# Altium PCB PCB1.PcbDoc
Units mil, origin at the board's own origin, x right, y up, seen from the top; angles counter-clockwise.
Board outline 2452.51 x 1847.55 mil, 2 copper layers (Top Layer, Bottom Layer); 55 components, 46 nets, 215 pads, 70 vias.
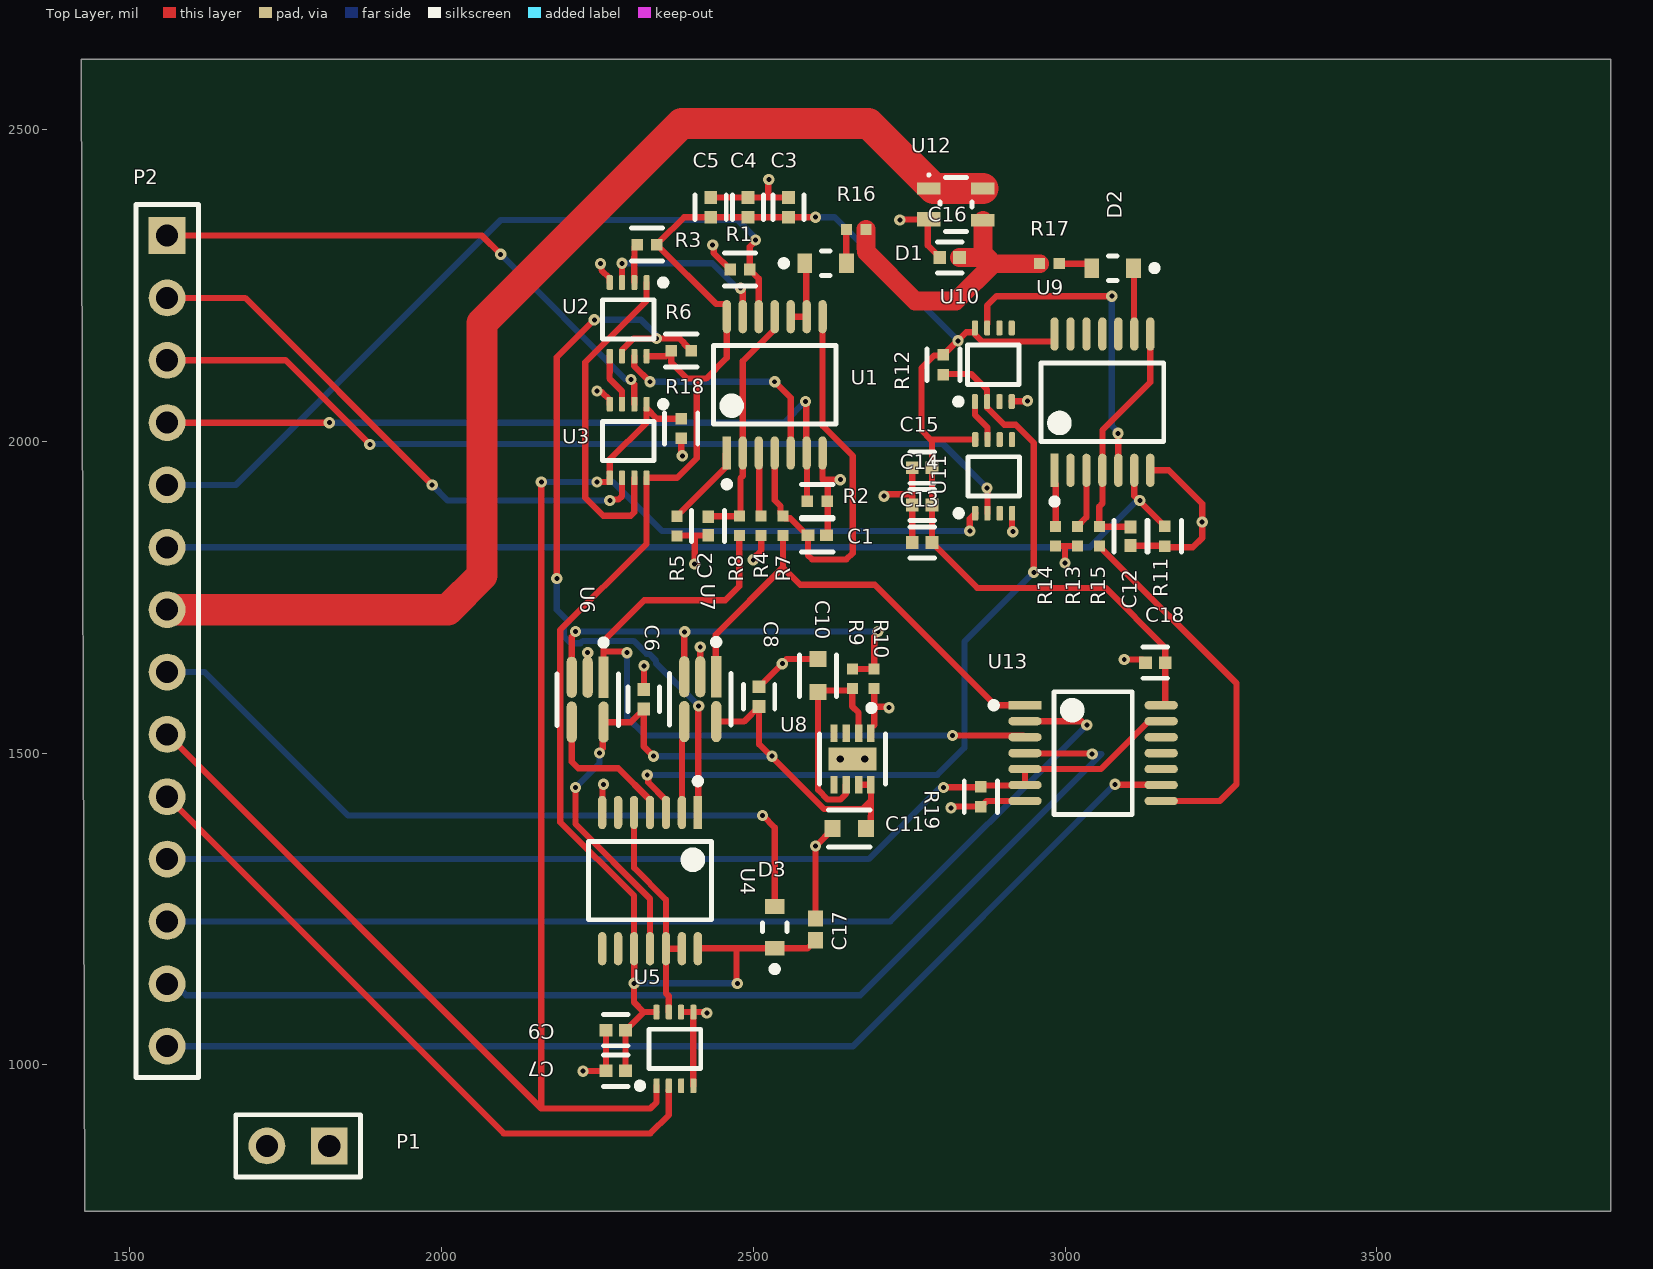
[diagram p0: Top Layer view]
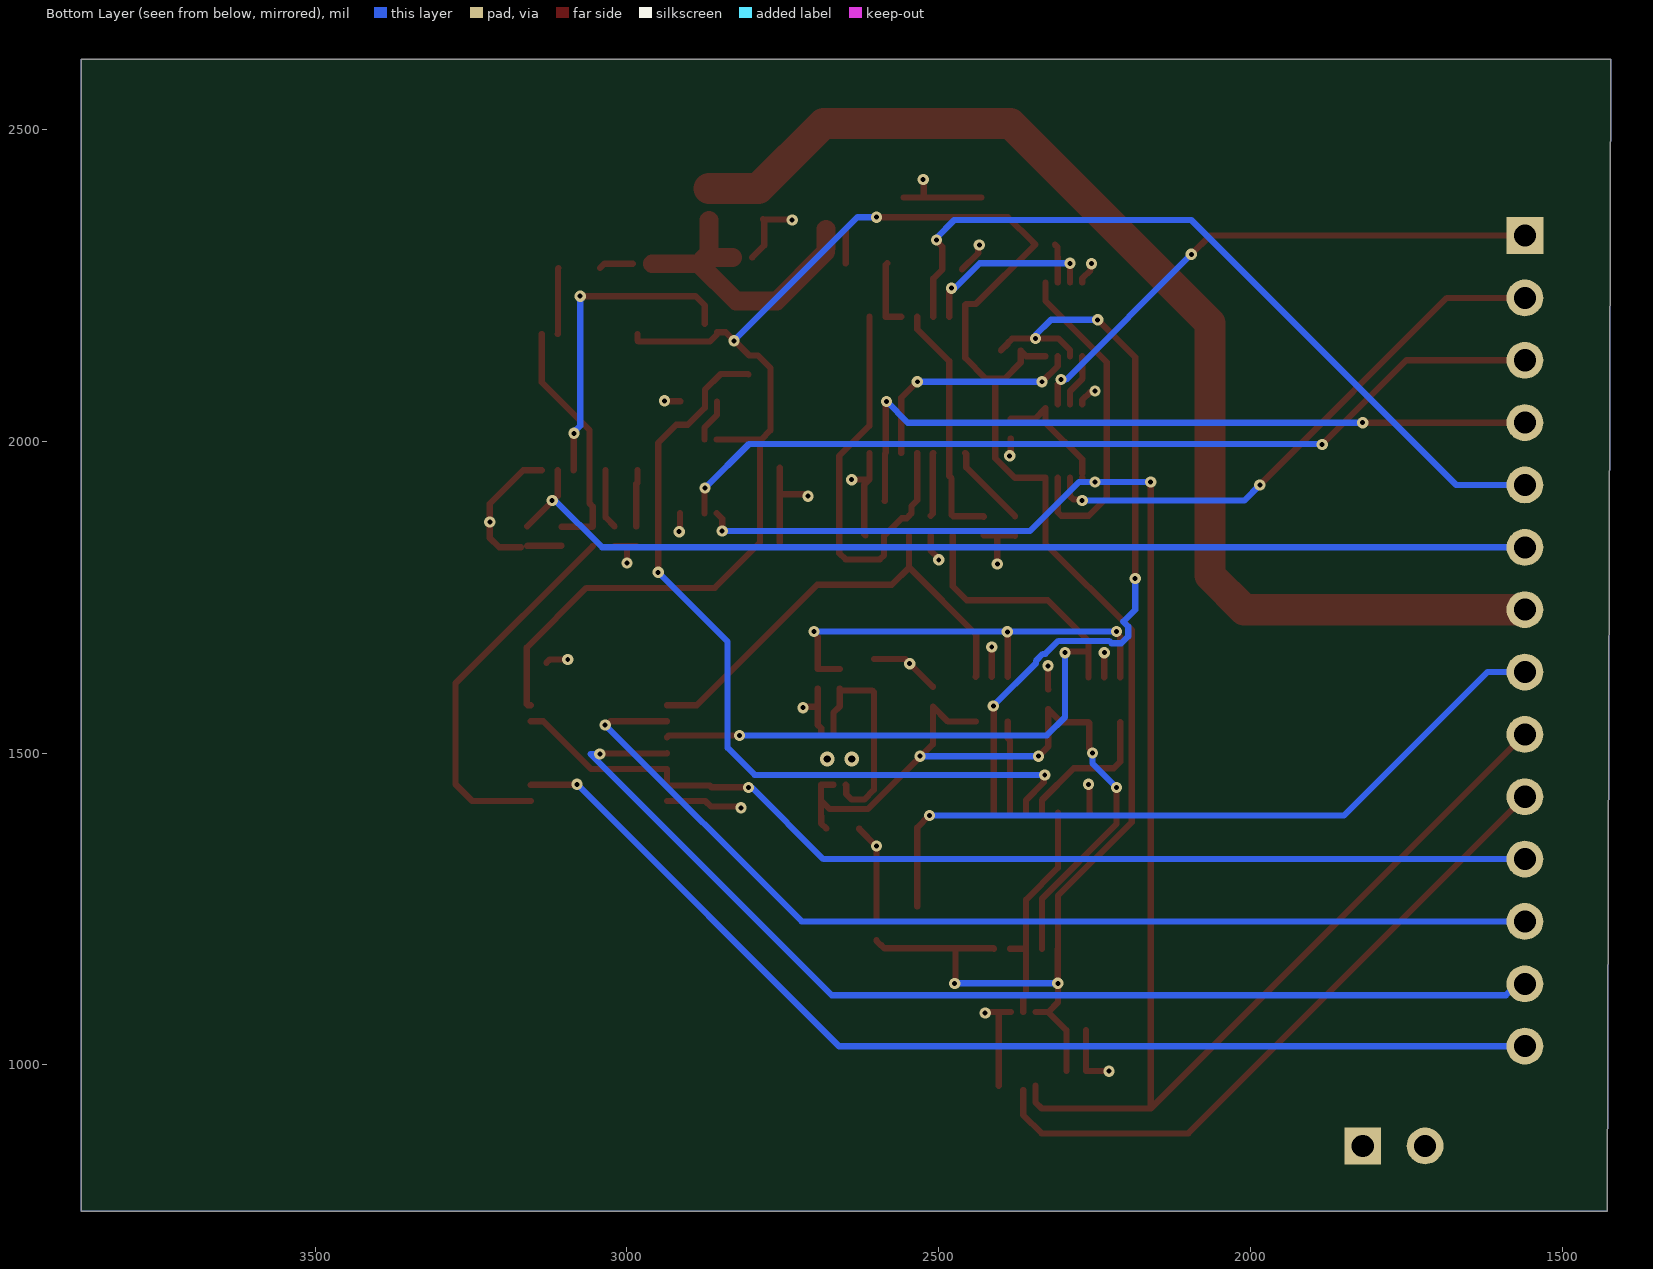
[diagram p1: Bottom Layer view, seen from below]
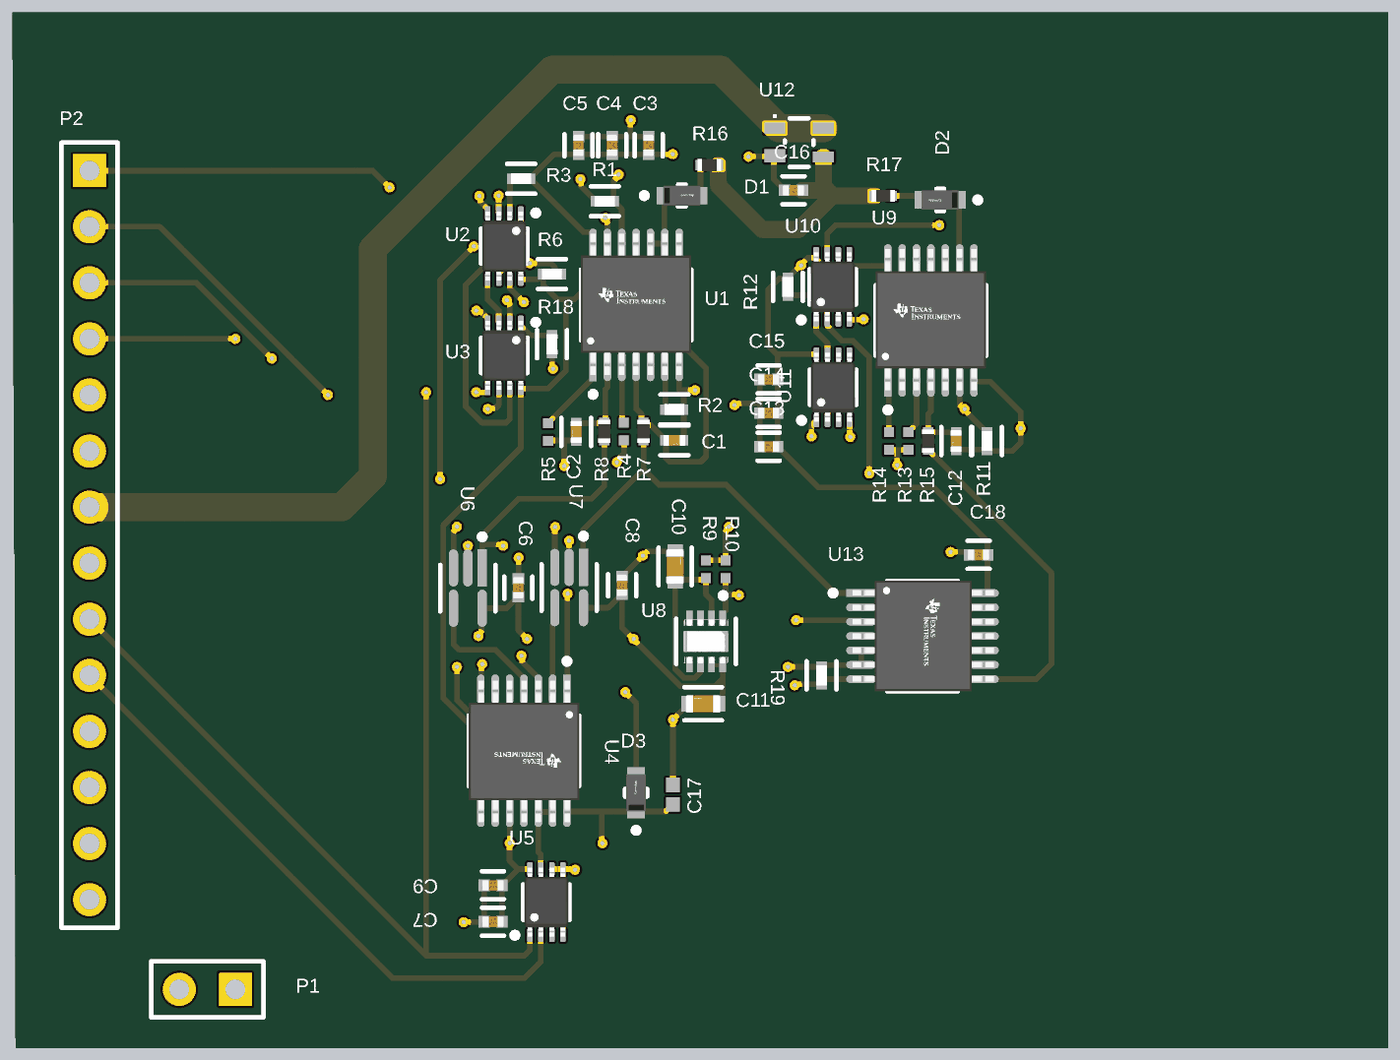
[diagram p2: 3D render of the assembled board from above, using the file's embedded part models]

## Layer stack, top to bottom
Top Solder: solder mask 0.4, Solder Resist, Dk 3.5
Top Layer: signal copper 1.4
Dielectric 1: dielectric 12.6, FR-4, Dk 4.8
Bottom Layer: signal copper 1.4
Bottom Solder: solder mask 0.4, Solder Resist, Dk 3.5

## Board outline
1422.49,2612.55 1428.07,765 3875,765 3875,2612.55

## Design rules (kind name [scope] priority, off if disabled: settings)
Clearance [All] p1: gap=5 ignorepadtopadclearanceinfootprint=FALSE
PolygonConnect [All] p1: connectstyle=Relief reliefconductorwidth=10 reliefentries=4 polygonreliefangle="90 Angle" airgapwidth=10
RoutingVias [All] p1: holewidth=8 width=18 viastyle="Through Hole" minholewidth=8 minwidth=18 maxholewidth=28 maxwidth=50
SolderMaskExpansion [All] p1: expansion=4 istentingtop=FALSE
Width [All] p1: maxlimit=50 minlimit=10 preferedwidth=10
30 further rules are at their usual default settings.

## Classes and differential pairs
component class U_HRT1: C12 C13 C14 C15 D2 R11 R12 R13 R14 R15 U9 U10 U11
component class HRT: C1 C2 C3 C4 C5 D1 R1 R2 R3 R4 R5 R6 R7 R8 U1 U2 U3
component class CHRT: C16 C17 C18 D3 P1 P2 R16 R17 R18 R19 U12 U13
component class Cascade: C6 C7 C8 C9 C10 C11 R9 R10 U4 U5 U6 U7 U8

## Components (designator, comment, footprint, x,y, rotation, side; value= is the part's Value field where it differs from the comment)
C1 "GRM155R71C224KA12D" FP-GRM155-0_05-IPC_C 2602.64,1849.12 r0 top
C2 "GRM155R71C224KA12D" FP-GRM155-0_05-IPC_C 2427.64,1864.12 r270 top
C3 "C0402C104K8PACTU" FP-C0402-BB-MFG 2556.69,2375.19 r90 top value="0.10 μF"
C4 "C0402C104K8PACTU" FP-C0402-BB-MFG 2491.69,2375.19 r90 top value="0.10 μF"
C5 "C0402C104K8PACTU" FP-C0402-BB-MFG 2431.69,2375.19 r90 top value="0.10 μF"
C6 "C0402C104K8PACTU" FP-C0402-BB-MFG 2324.41,1586.34 r270 top value="0.10 μF"
C7 "C0402C104K8PACTU" FP-C0402-BB-MFG 2279.41,990.59 r180 top value="0.10 μF"
C8 "C0402C104K8PACTU" FP-C0402-BB-MFG 2509.41,1590.59 r270 top value="0.10 μF"
C9 "C0402C104K8PACTU" FP-C0402-BB-MFG 2279.41,1055.59 r180 top value="0.10 μF"
C10 "GRM188R71A225KE15D" FP-GRM188-0_1-e0_2_0_5-MFG 2603.94,1624.25 r90 top
C11 "GRM188R71A225KE15D" FP-GRM188-0_1-e0_2_0_5-MFG 2653.94,1379.25 r180 top
C12 "GRM155R71C224KA12D" FP-GRM155-0_05-IPC_C 3105,1847.84 r270 top
C13 "C0402C104K8PACTU" FP-C0402-BB-MFG 2770.75,1837.84 r180 top value="0.10 μF"
C14 "C0402C104K8PACTU" FP-C0402-BB-MFG 2770.75,1897.84 r180 top value="0.10 μF"
C15 "C0402C104K8PACTU" FP-C0402-BB-MFG 2770.75,1957.84 r180 top value="0.10 μF"
C16 "C0402C104K8PACTU" FP-C0402-BB-MFG 2815,2295 r180 top value="0.10 μF"
C17 "ZRB15XR61A106ME01D" CAPC1005X55X25NL05T10 2600,1217.32 r270 top
C18 "C0402C104K8PACTU" FP-C0402-BB-MFG 3145,1645 r0 top value="0.10 μF"
D1 "CDBU0240" FP-SOD-523F-MFG 2615.94,2285.59 r0 top
D2 "CDBU0240" FP-SOD-523F-MFG 3076.54,2277.84 r180 top
D3 "CDBU0240" FP-SOD-523F-MFG 2534.41,1220.59 r90 top
P1 "Header 2" HDR1X2 1820,870 r180 top
P2 "Header 14" HDR1X14 1560,2330 r270 top
R1 "CRCW040210M0JNED" FP-CRCW0402-e3-IPC_C 2478.58,2275.59 r0 top
R2 "CRCW040210M0JNED" FP-CRCW0402-e3-IPC_C 2602.64,1904.12 r180 top
R3 "CRCW040210M0JNED" FP-CRCW0402-e3-IPC_C 2329.41,2315.59 r180 top
R4 "CRCW040222R0FKED" RESC1005X40X25LL05T05 2512.64,1864.87 r270 top
R5 "CRCW040222R0FKED" RESC1005X40X25LL05T05 2377.64,1864.12 r270 top
R6 "CRCW040210M0JNED" FP-CRCW0402-e3-IPC_C 2384.41,2145.59 r0 top
R7 "ERJ-2RKF1000X" RESC1005X40X25LL05T05 2547.64,1864.87 r270 top
R8 "ERJ-2RKF1000X" RESC1005X40X25LL05T05 2477.64,1864.87 r270 top
R9 "ERJ-2GEJ915X" RESC1005X40X25LL05T05 2658.94,1619.25 r270 top
R10 "CRCW04022M40FKED" RESC1005X40X25LL05T05 2693.94,1619.25 r270 top
R11 "CRCW040210M0JNED" FP-CRCW0402-e3-IPC_C 3160,1847.84 r90 top
R12 "CRCW040210M0JNED" FP-CRCW0402-e3-IPC_C 2805,2122.84 r270 top
R13 "CRCW040222R0FKED" RESC1005X40X25LL05T05 3020,1847.84 r270 top
R14 "CRCW040222R0FKED" RESC1005X40X25LL05T05 2985,1847.84 r270 top
R15 "ERJ-2RKF1000X" RESC1005X40X25LL05T05 3055,1847.84 r270 top
R16 "RMCF0402FT10K0" RESC1005X40X25LL05T05 2665,2340 r180 top
R17 "ERJ-2RKF1000X" RESC1005X40X25LL05T05 2975,2285 r0 top
R18 "CRCW040210M0JNED" FP-CRCW0402-e3-IPC_C 2384.41,2020.59 r90 top
R19 "CRCW040210M0JNED" FP-CRCW0402-e3-IPC_C 2865,1430 r270 top
U1 "TS3A4751PWR" FP-PW0014A-IPC_C 2534.41,2090.59 r90 top
U2 "SN74AUP2G00DCUR" DCU0008A_L 2299.41,2195.59 r270 top
U3 "SN74AUP2G79DCUR" DCU0008A_L 2299.41,2000.59 r270 top
U4 "TS3A4751PWR" FP-PW0014A-IPC_C 2334.41,1295.59 r270 top
U5 "SN74AUP2G79DCUR" DCU0008A_L 2374.41,1025.59 r90 top
U6 "TLV3691IDCKR" FP-DCK0005A-IPC_A 2234.41,1585.59 r270 top
U7 "TLV3691IDCKR" FP-DCK0005A-IPC_A 2415,1586.56 r270 top
U8 "MCP1810T-12I/J8A" FP-C04-1207A-MFG 2659.09,1490.59 r270 top
U9 "TS3A4751PWR" FP-PW0014A-IPC_C 3060,2062.84 r90 top
U10 "SN74AUP2G00DCUR" DCU0008A_L 2885,2122.84 r90 top
U11 "SN74AUP2G79DCUR" DCU0008A_L 2885.47,1943.78 r90 top
U12 "S-1313A22-N4T1U3" SC82AB 2825,2380 r0 top
U13 "TS3A4751PWR" FP-PW0014A-IPC_C 3045,1500 r0 top

## Footprints (in the part's own frame and the unit in brackets; to place one, negate y for a bottom-side part, rotate by r counter-clockwise, add the part's x,y. Pads: shape width x height; smd on the part's side, far side on the other; paste and mask are expansions set on the pad)
CAPC1005X55X25NL05T10 [mm] "Chip Capacitor, 2-Leads, Body 1.00x0.50mm, IPC Medium Density"
  rect 0.66x0.62 smd: 1(-0.44,0) 2(0.44,0)
  body extent -0.53,-0.28 0.53,0.27, height 0.55
DCU0008A_L [mm] "SOP, 8-Leads, Body 2.4x2.1mm, Pitch 0.5mm, IPC High Density"
  rrect40% 0.6x0.25 smd: 1(-1.5,0.75) 2(-1.5,0.25) 3(-1.5,-0.25) 4(-1.5,-0.75) 5(1.5,-0.75) 6(1.5,-0.25) 7(1.5,0.25) 8(1.5,0.75)
  silkscreen extent -1.62,-1.05 0.8,1.55, body extent -1.56,-1 1.56,1, height 0.9
FP-C04-1207A-MFG [mm]
  rect 0.7x0.3 smd paste+0 mask+0: 1(-1.05,0.75) 2(-1.05,0.25) 3(-1.05,-0.25) 4(-1.05,-0.75) 5(1.05,-0.75) 6(1.05,-0.25) 7(1.05,0.25) 8(1.05,0.75)
  rect 0.95x1.95 smd paste+0 mask+0: 9(0,0)
  silkscreen extent -2.2,-1.35 1.02,1.35, body extent -1.5,-1.12 1.5,1.12, height 0.25
FP-C0402-BB-MFG [mm]
  rect 0.52x0.52 smd paste+0 mask+0: 1(-0.4,0) 2(0.4,0)
  silkscreen extent -0.5,-0.64 0.5,0.64, body extent -0.8,-0.4 0.8,0.4, height 0.25
FP-CRCW0402-e3-IPC_C [mil]
  rect 18.43x18.6 smd paste+0 mask+0: 1(-15.83,0) 2(15.83,0)
  silkscreen extent -25,-27 25,27, body extent -29,-15 29,15, height 10
FP-DCK0005A-IPC_A [mm]
  rect 1.677x0.416 smd paste+0 mask+0: 1(-0.914,0.65)
  rrect100% 1.677x0.416 smd paste+0 mask+0: 2(-0.914,0) 3(-0.914,-0.65) 4(0.914,-0.65) 5(0.914,0.65)
  silkscreen extent -2.45,-1.25 1.05,1.25
FP-GRM155-0_05-IPC_C [mil]
  rect 20.29x18.6 smd paste+0 mask+0: 1(-14.9,0) 2(14.9,0)
  silkscreen extent -25,-27 25,27, body extent -29,-15 29,15, height 10
FP-GRM188-0_1-e0_2_0_5-MFG [mm]
  rect 0.65x0.7 smd paste+0 mask+0: 1(-0.675,0) 2(0.675,0)
  silkscreen extent -0.85,-0.75 0.85,0.75, body extent -1.1,-0.55 1.1,0.55, height 0.25
FP-PW0014A-IPC_C [mm]
  rect 1.355x0.341 smd paste+0 mask+0: 1(-2.775,1.95)
  rrect100% 1.355x0.341 smd paste+0 mask+0: 2(-2.775,1.3) 3(-2.775,0.65) 4(-2.775,0) 5(-2.775,-0.65) 6(-2.775,-1.3) 7(-2.775,-1.95) 8(2.775,-1.95) 9(2.775,-1.3) 10(2.775,-0.65) 11(2.775,0) 12(2.775,0.65) 13(2.775,1.3) 14(2.775,1.95)
  silkscreen extent -4.17,-2.5 1.6,2.5, body extent -3.55,-2.6 3.55,2.6, height 0.25
FP-SOD-523F-MFG [mm]
  rect 0.6x0.8 smd paste+0 mask+0: 1(-0.85,0) 2(0.85,0)
  silkscreen extent -1.82,-0.5 0.18,0.5, body extent -1.25,-0.6 1.25,0.6, height 0.25
HDR1X2 [mm] "Connector; Header; 2 Position"
  rect 1.5x1.5 hole 0.9: 1(0,0)
  round 1.5 hole 0.9: 2(2.54,0)
  silkscreen extent -1.27,-1.27 3.81,1.27
HDR1X14 [mm] "Connector; Header; 14 Position"
  rect 1.5x1.5 hole 0.9: 1(0,0)
  round 1.5 hole 0.9: 2(2.54,0) 3(5.08,0) 4(7.62,0) 5(10.16,0) 6(12.7,0) 7(15.24,0) 8(17.78,0) 9(20.32,0) 10(22.86,0) 11(25.4,0) 12(27.94,0) 13(30.48,0) 14(33.02,0)
  silkscreen extent -1.27,-1.27 34.29,1.27
RESC1005X40X25LL05T05 [mm] "Chip Resistor, 2-Leads, Body 1.00x0.50mm, IPC High Density"
  rect 0.45x0.45 smd: 1(-0.4,0) 2(0.4,0)
  body extent -0.53,-0.27 0.53,0.28, height 0.4
SC82AB [mm] "SOT143, 4-Leads, Body 2.00x2.15mm, Pitch 1.30mm, IPC Medium Density"
  rect 0.95x0.5 smd: 1(-1.1,0.65) 3(1.1,-0.65) 4(1.1,0.65)
  rect 0.95x0.6 smd: 2(-1.1,-0.6)
  silkscreen extent -1.15,-1.1 0.65,1.25, body extent -0.63,-1.1 0.63,1.1, height 1.1

## Part data
C1 C2 C12: library part CMP-1034-02089-3, "Chip Multilayer Ceramic Capacitors for General Purpose, 0402, 0.22uF, X7R, 15%, 10%, 16V", Capacitance=220nF, Case Code (Imperial)=0402, Case Code (Metric)=1005, Dielectric=X7R, Max Operating Temperature=125°C, Min Operating Temperature=-55°C, Package Quantity=1, Tolerance=10%, Voltage=16V, Case/Package=0402, Depth=0.5mm, Height=0.5mm, Lead Free="Lead Free", Length=1mm, Material=Ceramic, Mount="Surface Mount", Packaging="Tape and Reel", Radiation Hardening=No, REACH SVHC="No SVHC", Termination=SMD/SMT, Thickness=0.022inch, Voltage Rating=16V, Voltage Rating (DC)=16V, Width=0.02inch
C3 C4 C5 C6 C7 C8 C9 C13 C14 C15 C16 C18: library part CMP-2008-02046-2, "CAP CER 0.1UF 10V X5R 0402", Capacitance="0.10 μF", Manufacturer=Kemet, Package=C0402-BB, Temperature="-55°C to +125°C", Temperature Characteristic=X5R, Temperature Coefficient=15%, Temperature Range High=+125°C, Temperature Range Low=-55°C, Tolerance=0.1, Voltage Rating="10 V", Automotive=No, Category=Cap, ComponentLink2Description=Datasheet, ComponentLink2URL=https://content.kemet.com/datasheets/KEM_C1002_X7R_SMD.pdf, Device Class L1="Passive Components", Device Class L2=Capacitors, Device Class L3="Ceramic Capacitors", Digikey Description="CAP CER 0.1UF 10V X5R 0402", Height=0.55mm, Ipc Land Pattern Name=CAPC10050X50, Lead Free=Yes, Manufacturer Part Number=C0402C104K8PACTU, Material=Ceramic, Mouser Description="Capacitor 100 nF 10 VDC 0402", Octopart=https://octopart.com/c0402c104k8pactu-kemet-140039, RoHS=TRUE
C10 C11: library part CMP-2006-02836-2, "Chip Multilayer Ceramic Capacitors for General Purpose, 0603, 2.2uF, X7R, 15%, 10%, 10V", Capacitance=2.2uF, Case Code (Imperial)=0603, Case Code (Metric)=1608, Dielectric=X7R, Max Operating Temperature=125°C, Min Operating Temperature=-55°C, Package Quantity=1, Tolerance=10%, Voltage=10V, Case/Package=0603, Depth=0.8mm, Height=0.8mm, Lead Free="Lead Free", Length=1.6mm, Material=Ceramic, Mount="Surface Mount", Number of Pins=2, Packaging="Cut Tape", REACH SVHC="No SVHC", Termination=SMD/SMT, Thickness=0.035inch, Voltage Rating=10V, Voltage Rating (DC)=10V, Weight=7.1E-05oz, Width=0.031inch
C17: library part CMP-2008-04012-1, Capacitance=10uF, Manufacturer=Murata, Part Number=GRM155R60G106ME44D
D1 D2 D3: library part CMP-20227-000007-1, "DIODE SCHOTTKY 40V 200MA 0603", Average Rectified Current=200mA, Capacitance=9pF, Case/Package=SMD/SMT, Max Power Dissipation=150mW, Max Reverse Leakage Current=1uA, Max Reverse Voltage (DC)=40V, Max Surge Current=2A, Package Quantity=1, Current Rating=200mA, Lead Free="Lead Free", Mount="Surface Mount", Output Current=200mA, Packaging="Tape and Reel", Polarity=Standard, RoHS Compliant=Yes, Voltage Rating (DC)=40V
P1: "Header, 2-Pin", LatestRevisionDate=17-Jul-2002, LatestRevisionNote="Re-released for DXP Platform.", Publisher="Altium Limited"
P2: "Header, 14-Pin", LatestRevisionDate=17-Jul-2002, LatestRevisionNote="Re-released for DXP Platform.", Publisher="Altium Limited"
R1 R2 R3 R6 R11 R12 R18 R19: library part CMP-1011-00170-3, "RES Thick Film, 10MΩ, 5%, 0.063W, 200ppm/°C, 0402", Case Code (Imperial)=0402, Case Code (Metric)=1005, Max Operating Temperature=155°C, Max Power Dissipation=63mW, Min Operating Temperature=-55°C, Package Quantity=1, Resistance=10MR, Temperature Coefficient=200ppm/°C, Tolerance=5%, Voltage Rating=50V, Case/Package=0402, Composition="Thick Film", Contact Plating=Tin, Depth=0.5mm, Features="Automotive AEC-Q200", Height=0.016inch, Lead Free="Lead Free", Length=1mm, Military Standard=Not, Number of Terminations=2, Packaging="Tape and Reel", Power Rating=63mW, Radiation Hardening=No, Termination=SMD/SMT, Voltage Rating (DC)=50V, Weight=2.3E-05oz, Width=0.5mm
R4 R5 R13 R14: library part CMP-2002-08382-1, Manufacturer="Vishay Dale", Part Number=CRCW040222R0FKED
R7 R8 R15 R17: library part CMP-2002-00605-3, "Chip Resistor, 100 Ohm, +/- 1%, 100 mW, -55 to 155 degC, 0402 (1005 Metric), RoHS, Tape and Reel", Case Code (Imperial)=0402, Case Code (Metric)=1005, Manufacturer="Basic Passives", Max Operating Temperature="155 degC", Min Operating Temperature="-55 degC", Package Quantity=10000, Power Rating="100 mW", Resistance="100 Ohm", Tolerance=1%, Voltage Rating="50 V", Case\/Package=0402, ComponentLink1Description="Manufacturer URL", ComponentLink1URL=http://www.panasonic.com/, ComponentLink2Description=Datasheet, ComponentLink2URL=http://industrial.panasonic.com/cdbs/www-data/pdf/RDA0000/AOA0000C86.pdf, DatasheetVersion=04/2015, Height="0.35 mm", Length="1 mm", Mount="Surface Mount", Mounting Technology="Surface Mount", PackageDescription="2-Pin Surface Mount Device, Body 1 x 0.5 mm", PackageReference=0402, Packaging="Tape and Reel", PartNumber=ERJ-2RKF1000X, Pins=2, Radiation Hardening=No, REACH SVHC=Yes, RoHSCompliant=true, Width="0.5 mm"
R9: library part CMP-2002-00597-1, Manufacturer=Panasonic, Part Number=ERJ-2GEJ915X
R10: library part CMP-1011-00890-2, Manufacturer="Vishay Dale", Part Number=CRCW04022M40FKED
R16: library part CMP-2000-07588-1, "Chip Resistor, 10 KOhm, +/- 1%, 0.1 W, -55 to 155 degC, 0402 (1005 Metric), RoHS, Tape and Reel", Case Code (Imperial)=0402, Case Code (Metric)=1005, Manufacturer=Panasonic, Max Operating Temperature=155degC, Max Power Dissipation=100mW, Min Operating Temperature=-55degC, Package Description="2-Pin Surface Mount Device, Body 1 x 0.5 mm", Package Quantity=1, Package Reference=402, Resistance=10KOhm, Temperature Coefficient=100ppm\/degreesC, Tolerance=1%, Voltage Rating=50V, Case\/Package=0402, Composition=ThickFilm, Contact Plating=Tin, Datasheet URL=https://industrial.panasonic.com/cdbs/www-data/pdf/RDA0000/AOA0000C304.pdf, Datasheet Version=02/2017, Depth=0.5mm, Height=0.35mm, Lead Free=LeadFree, Length=1mm, Manufacturer URL=http://www.panasonic.com/, Military Standard=Not, Mount=SurfaceMount, Mounting Technology=SurfaceMount, Number of Pins=2, Number of Terminations=2, Packaging=TapeandReel, Power Rating=100mW, Radiation Hardening=No, REACH SVHC=NoSVHC, RoHSCompliant=True, Termination=SMD/SMT, Voltage Rating (DC)=50V, Width=0.02inch
U1 U4 U9 U13: library part CMP-04892-000059-1, "IC SWITCH QUAD SPST 14TSSOP", Case/Package=TSSOP, High Level Output Current=100mA, Max Operating Temperature=85°C, Max Supply Current=75nA, Max Supply Voltage=3.6V, Min Operating Temperature=-40°C, Min Supply Voltage=1.6V, On-State Resistance=900mR, Operating Supply Voltage=3V, Package Quantity=1, Bandwidth=125MHz, Contact Plating=Gold, Height=1.05mm, Lead Free="Lead Free", Length=5.1mm, Low Level Output Current=100mA, Mount="Surface Mount", Number of Channels=4, Number of Inputs=4, Number Of Outputs=4, Number of Pins=14, Packaging="Tape and Reel", Polarity=Non-Inverting, Radiation Hardening=No, REACH SVHC="No SVHC", RoHS Compliant=Yes, Supply Type=Single, Termination=SMD/SMT, Throw Configuration=SPST, Turn-Off Delay Time=9ns, Turn-On Delay Time=14ns, Weight=0.002018oz, Width=4.5mm
U2 U10: library part CMP-0859-00590-3, "Low-Power Dual 2-Input Positive-NAND Gate, DCU0008A, LARGE T&R", F @ Nom Voltage(Max)(Mhz)=100, Generic Part Number=SN74AUP2G00, ICC @ Nom Voltage(Max)(mA)=0.0009, Manufacturer="Texas Instruments", Operating Temperature Range(C)="-40 to 85", Rating=Catalog, tpd @ Nom Voltage(Max)(ns)=31.8,26.3,16.6,12.9,8.8,6.7, Voltage(Nom)(V)=0.8,1.2,1.5,1.8,2.5,3.3, 3-State Output=No, Bits(#)=2, DatasheetVersion=SCES752C, Gate Type=NAND, Input Type=CMOS, Logic=True, Output Drive (IOL/IOH)(Max)(mA)=20/-20, Output Type=CMOS, PackageReference=DCU0008A, Schmitt Trigger=No, Sub-Family="NAND Gate", Technology Family=AUP, VCC(Max)(V)=3.6, VCC(Min)(V)=0.8
U3 U5 U11: library part CMP-0859-00716-3, "Low-Power Dual Positive-Edge-Triggered D-Type Flip-Flop, DCU0008A, LARGE T&R", F @ Nom Voltage(Max)(Mhz)=100, Generic Part Number=SN74AUP2G79, ICC @ Nom Voltage(Max)(mA)=0.0009, Manufacturer="Texas Instruments", Operating Temperature Range(C)="-40 to 85", Rating=Catalog, tpd @ Nom Voltage(Max)(ns)=27.2,17.3,13.3,11.3,7.8,6.3, Voltage(Nom)(V)=0.8,1.2,1.5,1.8,2.5,3.3, 3-State Output=No, Bits(#)=2, DatasheetVersion=SCES755C, Input Type=CMOS, Logic=True, Output Drive (IOL/IOH)(Max)(mA)=20/-20, Output Type=CMOS, PackageReference=DCU0008A, Schmitt Trigger=No, Sub-Family="D-Type Flip-Flop", Technology Family=AUP, VCC(Max)(V)=3.6, VCC(Min)(V)=0.8
U6 U7: library part CMP-04896-000044-1, "IC COMPARATOR NANO-POWER SC70-5", Case/Package=SC, Input Bias Current=100pA, Input Offset Voltage (Vos)=3mV, Max Dual Supply Voltage=3.25V, Max Operating Temperature=125°C, Max Supply Voltage=6.5V, Min Dual Supply Voltage=450mV, Min Operating Temperature=-40°C, Min Supply Voltage=900mV, Output Current=42mA, Package Quantity=3000, Quiescent Current=150nA, Contact Plating=Gold, Lead Free="Lead Free", Max Input Current=100pA, Mount="Surface Mount", Number of Channels=1, Number of Elements=1, Number of Pins=5, Packaging="Tape and Reel", Propagation Delay=35us, Radiation Hardening=No, Response Time=24us, RoHS Compliant=Yes, Type="General Purpose"
U8: library part CMP-06324-000006-1, "IC REG LINEAR 1.2V 150MA 8VDFN", Dropout Voltage=380mV, Manufacturer="Microchip Technology", Max Junction Temp=+150°C, Max Supply Voltage=5.5V, Min Supply Voltage=2.5V, Nominal Supply Current=0.02uA, Output Current=150mA, Output Voltage=1.2V, Package=C04-1207A, Temperature="-40°C to +85°C", Temperature Range High=+85°C, Temperature Range Low=-40°C, Automotive=No, Category=IC, ComponentLink2Description=Datasheet, ComponentLink2URL=http://ww1.microchip.com/downloads/en/DeviceDoc/20005623B.pdf, Device Class L1="Integrated Circuits (ICs)", Device Class L2="Power Management ICs", Device Class L3="Voltage Regulators - Linear", Digikey Description="IC REG LINEAR 1.2V 150MA 8VDFN", Height=0.9mm, Ipc Land Pattern Name=DFN200X200X85-8, Lead Free=Yes, Manufacturer Part Number=MCP1810T-12I/J8A, Number Of Outputs=1, Octopart=https://octopart.com/mcp1810t-12i%2Fj8a-microchip-75615047, Output Type=Fixed, RoHS=TRUE, Standoff Height=0mm

## Via types
v1: diameter 18, hole 8, Top Layer to Bottom Layer, 68 vias
v2: diameter 23.62, hole 11.81, Top Layer to Bottom Layer, 2 vias

## Nets (pads, with @x,y where several pads share a name; then routed paths per layer and width w, separated by ;. In a path a pad name is that pad's centre, name@x,y a point inside that pad or via, vN(x,y) a via of type N, cw(c..) or ccw(c..) an arc to the next point about the centre after c; other vN are vias at no path point)
ADC0: P2.12 U13.2 | length 1707.3
  Top Layer w10: U13.2 3026.65,1551.18 3032.84,1545 v1(3035,1545)
  Bottom Layer w10: P2.12 2720,1230 v1(3035,1545)
ADC1: P2.13 U13.4 | length 1789.6
  Top Layer w10: U13.4 2936.39,1499.35 3042.61,1499.35 v1(3043.54,1498.42)
  Bottom Layer w10: P2.13 1571.98,1130 1590.39,1111.59 2671.59,1111.59 3058.42,1498.42 v1(3043.54,1498.42)
ADC2: P2.14 U13.9 | length 1768.7
  Top Layer w10: v1(3080,1450) 3080.59,1449.41 3153.68,1449.41 U13.9
  Bottom Layer w10: P2.14 2660,1030 v1(3080,1450)
CASCADE_EN: P2.10 U5.2 | length 1080.6
  Top Layer w10: P2.10 2100,890 2335,890 2364.49,919.49 U5.2@2364.49,959.72
CHRT_VIN: C3.1 C4.1 C5.1 C7.1 C9.1 C13.1 C14.1 C15.1 C17.2 C18.2 D3.1 R3.1 R6.1 R12.1 U1.14 U2.8 U3.8 U4.10 U4.14 U5.8 U9.14 U10.8 U11.8 U13.14 | length 3885.1
  Top Layer w10: C7.1 C9.1 2324.21,1084.65 ; U2.8 2359.61,2136.54 2368.58,2145.51 2368.58,2126.42 2394.41,2100.59 2409.41,2100.59 ; U5.8 2324.21,1084.65 ; U4.14 2411.98,1187.13 2473.2,1187.13 ; v1(2474.41,1130.59) 2473.2,1131.8 2473.2,1187.13 ; v1(2599.75,2359.53) 2599.67,2359.44 C3.1 C4.1 C5.1 2389.1,2359.44 2349.54,2319.89 2349.46,2319.89 2345.24,2315.68 R3.1 2345.24,2315.51 2440.26,2220.49 2456.06,2220.49 2457.64,2218.91 U1.14 2457.64,2133.82 2424.41,2100.59 2409.41,2100.59 ; C17.2 2600,1199.21 2592.8,1192.01 2592.01,1192.01 2587.13,1187.13 D3.1 2473.2,1187.13 ; U10.8@2855.55,2171.78 2867.25,2160.08 2981.65,2160.08 2983.23,2161.66 U9.14 ; U10.8@2855.55,2175.24 2855.39,2175.08 2841.5,2175.08 2805.08,2138.67 R12.1 2804.17,2137.84 2790,2137.84 2770,2117.84 2770,2017.84 2785,2002.84 ; U11.8 2785,2002.84 ; U13.14 3159.17,1576.77 3160.75,1578.35 C18.2 3160.75,1669.25 3065,1765 2859.33,1765 C13.1 C14.1 C15.1 2786.5,2001.34 2785,2002.84 ; 2324.21,1084.65 2308.82,1100.04 2308.82,1130.59 v1(2309.11,1130.89) 2309.11,1186.03 U4.10 2308.82,1271.11 2190.63,1389.3 2190.63,1697.5 2328.94,1835.81 U3.8 2377.89,1941.54 2409.41,1973.05 2409.41,2100.59
  Bottom Layer w10: v1(2309.11,1130.89) 2309.26,1130.74 2474.26,1130.74 v1(2474.41,1130.59) ; v1(2599.75,2359.53) 2630.47,2359.53 2828.56,2161.44 v1(2828.56,2161.3)
CLK: P2.9 R18.2 U3.1 U3.5 U5.1 U11.1 | length 3040
  Top Layer w10: P2.9 2160,930 ; v1(2160,1935) 2160,930 ; v1(2249.41,1935) 2249.68,1934.72 2269.8,1934.72 2269.88,1934.8 U3.5 ; U3.5@2269.88,1948.27 2269.88,1971.1 2328.94,2030.16 2328.94,2052.91 2345.43,2036.42 R18.2 ; U5.1 2344.88,939.88 2335,930 2160,930 ; v1(2847.25,1856.14) 2847.25,1876.03 U11.1
  Bottom Layer w10: v1(2160,1935) 2275,1935 2353.86,1856.14 v1(2847.25,1856.14)
EN_ADC: P2.11 R19.1 U13.5 U13.6 U13.13 | length 1700.9
  Top Layer w10: v1(2805,1445) 2805.42,1445.42 2864.58,1445.42 R19.1 2867.33,1448.17 2935.08,1448.17 U13.6 U13.5 3057.52,1474.41 3134.29,1551.18 U13.13
  Bottom Layer w10: P2.11 2685,1330 2800,1445 v1(2805,1445)
EN_CASCADE: U4.5 U4.12 U4.13 U5.7 | length 368.9
  Top Layer w10: U4.5 2308.82,1316.18 2360,1265 U4.12 ; U5.7 2364.57,1110.43 2360,1115 U4.12 ; U4.13 U4.12
EN_CHR_0: P2.4 R2.2 U1.6 | length 1199.1
  Top Layer w10: P2.4 v1(1820,2030) ; v1(2583.72,2064.1) 2584.94,2062.89 2584.94,1981.98 U1.6 2586.2,1980.72 2586.2,1904.73 R2.2
  Bottom Layer w10: v1(1820,2030) 2549.63,2030 v1(2583.72,2064.1)
EN_CHR_1: P2.5 R1.2 U1.12 | length 1269
  Top Layer w10: v1(2503.4,2323.1) 2503.4,2320.93 2494.41,2311.94 R1.2 2494.41,2275.51 2508.82,2261.1 U1.12
  Bottom Layer w10: P2.5 1670,1930 2095,2355 2475,2355 2505,2325 2503.4,2323.4 v1(2503.4,2323.1)
EN_CHR_2: P2.6 R11.2 U9.6 | length 1701.2
  Top Layer w10: U9.6 3111.18,1912.4 3159.92,1863.67 R11.2
  Bottom Layer w10: P2.6 3040,1830 3115,1905 v1(3120,1905)
EN_TIME_0: P2.1 U3.2 | length 881.3
  Top Layer w10: P2.1 2065,2330 v1(2095,2300) ; v1(2304.07,2099.07) 2304.07,2096.9 2309.25,2091.71 U3.2
  Bottom Layer w10: v1(2095,2300) 2295.86,2099.14 2303.99,2099.14 v1(2304.07,2099.07)
EN_TIME_1: P2.2 U3.6 | length 896.5
  Top Layer w10: P2.2 1685,2230 v1(1985,1930) ; v1(2270,1905) 2271.53,1906.53 2283.79,1906.53 2289.65,1912.39 U3.6 U3.6
  Bottom Layer w10: v1(1985,1930) 2010,1905 v1(2270,1905)
EN_TIME_2: P2.3 U11.2 | length 1441
  Top Layer w10: P2.3 1750,2130 v1(1885,1995) ; v1(2875,1925) 2875.55,1924.45 2875.55,1884.8 U11.2
  Bottom Layer w10: v1(1885,1995) 1885.72,1995.72 2804.28,1995.72 v1(2875,1925)
GND: C1.2 C2.2 C3.2 C4.2 C5.2 C6.1 C7.2 C8.1 C9.2 C10.2 C11.2 C12.2 C13.2 C14.2 C15.2 C16.2 C17.1 C18.1 P1.1 P1.2 R1.1 R2.1 R4.2 R5.2 R10.2 R11.1 R13.2 R14.2 R18.1 R19.2 U1.7 U2.4 U3.4 U4.7 U5.4 U5.5 U5.6 U6.2 U7.2 U8.1 U8.9 U9.7 U10.4 U11.4 U12.2 U13.7 | length 2244.4
  Top Layer w10: v1(2226.97,989.88) 2227.32,990.24 2263.31,990.24 C7.2 C9.2 ; U6.2 2234.41,1661 v1(2234.53,1661) ; v1(2249.41,2080.59) 2250.94,2079.06 2257.2,2079.06 2269.88,2066.38 U3.4 ; v1(2255,2285) 2256.53,2283.47 2256.53,2274.73 2269.88,2261.38 U2.4 ; U4.7 2258.29,1405.51 2258.29,1446.13 2260,1447.84 v1(2260,1450) ; C6.1 2324.7,1602.38 2324.7,1639.7 v1(2325,1640) ; R5.2 2378.06,1848.8 2402.64,1848.8 ; U5.6 U5.5 ; R18.1 2384.41,1978.53 v1(2386.21,1976.72) ; U5.4 U5.5 ; v1(2406.14,1803.48) 2406.14,1845.3 2402.64,1848.8 ; U7.2 v1(2415,1670) ; v1(2425.59,1083.28) 2424.23,1084.65 U5.5 ; C2.2 2427.22,1848.8 2402.64,1848.8 ; C5.2 C4.2 2524.19,2390.94 ; v1(2435,2315) 2436.53,2313.47 2436.53,2301.89 2462.74,2275.68 R1.1 ; v1(2500,1810) 2500,1812.16 2512.64,1824.8 R4.2 ; C8.1 v1(2546.54,1643.46) 2553.9,1650.83 C10.2 ; v1(2525,2420) 2524.19,2419.19 2524.19,2390.94 ; C3.2 2524.19,2390.94 ; C17.1 v1(2600,1350.91) 2627.36,1378.27 C11.2 ; U1.7 2611.18,1938.82 ; C1.2 2619.41,1850.99 2619.41,1930.59 2611.18,1938.82 ; v1(2639.57,1938.44) 2639.2,1938.82 2611.18,1938.82 ; U8.1 2688.62,1539.8 2693.94,1545.12 2693.94,1574.31 ; R10.2 2693.94,1574.31 ; v1(2709.66,1911.99) 2712.67,1915 2755,1915 ; v1(2717.83,1572.91) 2716.43,1574.31 2693.94,1574.31 ; v1(2735,2355) 2735.69,2355.69 U12.2@2781,2355.69 ; C13.2 C14.2 2755,1915 ; C15.2 2755,1915 ; U12.2 U12.2@2781,2355.69 ; C16.2 2780,2314.25 2780,2354.69 U12.2@2781,2355.69 ; v1(2817.16,1412.2) 2819.13,1414.17 R19.2 2865.08,1414.17 2874.15,1423.23 U13.7 ; U10.4 2914.53,2064.31 2914.61,2064.39 2939.39,2064.39 v1(2940,2065) ; U11.4 2915,1856.41 v1(2916.24,1855.17) ; R14.2 3002.5,1832.09 ; v1(3000,1805) 3000,1829.59 3002.5,1832.09 ; R13.2 3002.5,1832.09 ; v1(3095,1650) 3124.25,1650 C18.1 ; C12.2 3105.46,1832.47 3159.54,1832.47 R11.1 ; U9.7 3166.43,1953.57 3220,1900 v1(3220,1870.49) 3220,1845 3205,1830 3170,1830
  other v2: 2639.41,1490.59 2678.78,1490.59
INT_ADC0: R7.2 U7.1 U13.1 | length 751
  Top Layer w10: U7.1 2440,1623.11 2440,1690 2547.64,1797.64 ; R7.2 2547.64,1797.64 ; U13.1 2888.23,1576.77 2695,1770 2575.28,1770 2547.64,1797.64
INT_ADC1: R8.2 U6.1 U13.3 | length 1189.7
  Top Layer w10: U6.1 2260,1660 ; v1(2297.49,1661) 2297.49,1663.13 2263.13,1663.13 2260,1660 ; R8.2 2477.64,1767.64 2455,1745 2325,1745 2260,1680 2260,1660 ; v1(2819.59,1528.42) 2932.9,1528.42 U13.3
  Bottom Layer w10: v1(2297.49,1661) 2297.49,1557.51 2326.58,1528.42 v1(2819.59,1528.42)
INT_ADC2: R15.2 U13.8 | length 605
  Top Layer w10: R15.2 3275,1612.09 3275,1450 3248.23,1423.23 U13.8
NetC1_1: C1.1 R7.1 U1.4 U1.8 | length 669
  Top Layer w10: U1.4 2534.41,1905.59 2543.78,1896.22 2543.78,1884.48 R7.1 2551.5,1876.76 2559.25,1876.76 2586.89,1849.12 C1.1 2587.73,1817.27 2594.41,1810.59 2649.41,1810.59 2659.41,1820.59 2659.41,1976.7 2611.18,2024.93 U1.8
NetC2_1: C2.1 R8.1 U1.2 U1.11 | length 393.4
  Top Layer w10: C2.1 2428.43,1879.82 2476.84,1879.82 2479.41,1882.39 2479.41,1940.59 2483.23,1944.41 U1.2 2483.23,2128.7 2534.41,2179.88 U1.11
NetC10_1: C10.1 R9.2 U8.2 U8.6 | length 359.7
  Top Layer w10: U8.6 2648.35,1448.35 2648.35,1434.2 2639.61,1425.47 2619.52,1425.47 2603.94,1441.05 C10.1 2606.85,1600.59 2656.02,1600.59 R9.2 2658.94,1574.72 2668.94,1564.72 U8.2
NetC12_1: C12.1 R15.1 U9.4 U9.8 | length 392.7
  Top Layer w10: C12.1 3104.58,1863.16 3055.42,1863.16 R15.1 3055,1895.3 3060,1900.3 U9.4 3060,2017.84 3136.77,2094.61 U9.8
NetD1_1: D1.1 U1.9 U1.10 | length 112.6
  Top Layer w10: U1.10 U1.9 2584.94,2200.51 2584.94,2283.13 D1.1
NetD1_2: D1.2 R16.2 | length 54.5
  Top Layer w10: R16.2 2649.33,2339.92 2649.33,2285.67 D1.2
NetD2_1: D2.1 U9.9 | length 106.2
  Top Layer w10: D2.1 3110.59,2277.24 3110.59,2172.69 U9.9
NetD2_2: D2.2 R17.2 | length 55.5
  Top Layer w10: R17.2 3036.26,2285 3043.07,2278.19 D2.2
NetR3_2: R3.2 U2.2 | length 62.7
  Top Layer w10: U2.2 2309.25,2295.43 2309.41,2295.59 2309.41,2311.42 R3.2
NetR4_1: R4.1 U1.3 | length 102.3
  Top Layer w10: U1.3 2509.47,1980.67 2509.47,1883.79 R4.1
NetR5_1: R5.1 U1.1 | length 134.6
  Top Layer w10: R5.1 2455.93,1958.16 2455.93,1979.62 U1.1
NetR6_2: R6.2 U2.6 U4.1 | length 1235.7
  Top Layer w10: v1(2185,1780) 2185,2135 v1(2245,2195) ; U2.6 2289.65,2136.61 2289.65,2146.65 2307.89,2164.89 v1(2344.91,2164.89) 2381.93,2164.89 2388.95,2157.87 2388.95,2156.96 2400.24,2145.68 R6.2 ; U4.1 2411.8,1405.48 2411.8,1575.04 v1(2412.42,1575.66)
  Bottom Layer w10: v1(2185,1780) 2185,1730 2204.07,1710.93 2196,1702.87 2196,1687.13 2207.13,1676 2222.87,1676 2226.87,1680 2308.08,1680 2329.08,1659 2332.87,1659 2344,1647.87 2344,1644.08 v1(2412.42,1575.66) ; v1(2245,2195) 2320,2195 2344.91,2170.09 v1(2344.91,2164.89)
NetR12_2: R12.2 U4.3 U10.2 | length 1342.3
  Top Layer w10: v1(2330,1465) 2331.53,1463.47 2331.53,1453.3 2360,1424.83 U4.3 ; R12.2 2805.83,2107.84 2850,2107.84 2875.08,2082.76 2875.08,2053.82 2902.45,2026.45 2921.1,2026.45 2950,1997.56 v1(2950,1790)
  Bottom Layer w10: v1(2330,1465) 2795,1465 2838.59,1508.59 2838.59,1678.59 v1(2950,1790)
NetR13_1: R13.1 U9.3 | length 96
  Top Layer w10: R13.1 3034.41,1877.99 U9.3
NetR14_1: R14.1 U9.1 | length 90.7
  Top Layer w10: U9.1 2983.23,1933.59 2985,1931.82 R14.1
NetU1_5: U1.5 U2.7 | length 376.2
  Top Layer w10: U2.7 2309.25,2120.75 v1(2334.41,2095.59) ; v1(2534.41,2095.59) 2560,2070 U1.5
  Bottom Layer w10: v1(2334.41,2095.59) v1(2534.41,2095.59)
NetU1_13: U1.13 U2.3 | length 284.9
  Top Layer w10: v1(2289.41,2285.59) 2289.41,2261.69 2289.49,2261.61 2289.49,2254.72 U2.3 ; v1(2479.41,2245.59) 2479.41,2243.43 2483.23,2239.61 U1.13
  Bottom Layer w10: v1(2289.41,2285.59) 2434.41,2285.59 2474.41,2245.59 v1(2479.41,2245.59)
NetU2_1: U2.1 U3.7 | length 534.2
  Top Layer w10: U3.7 2309.25,1886.45 2303.39,1880.59 2259.41,1880.59 2230.41,1909.59 2230.41,2126.78 2328.94,2225.31 U2.1
NetU2_5: U2.5 U3.3 | length 85.4
  Top Layer w10: U2.5 2269.8,2136.46 2269.8,2110.98 2269.41,2110.59 2269.41,2100.59 2289.49,2080.51 2289.49,2059.72 U3.3
NetU4_2: U4.2 U7.4 | length 147.3
  Top Layer w10: U4.2 2385.59,1520.22 2389.41,1524.04 U7.4
NetU4_4: U4.4 U6.4 | length 234.4
  Top Layer w10: U6.4 2208.82,1486.18 2219.41,1475.59 2283.65,1475.59 2334.41,1424.83 U4.4
NetU9_5: U9.5 U10.7 | length 518.9
  Top Layer w10: U10.7@2875.24,2188.7 2875.24,2218.07 2890,2232.84 v1(3075,2232.84) ; v1(3085,2012.84) 3085.3,2012.54 3085.3,1953.86 U9.5
  Bottom Layer w10: v1(3075,2232.84) 3075,2025 3085,2015 v1(3085,2012.84)
NetU10_1: U10.1 U11.7 | length 69.3
  Top Layer w10: U10.1 2855.47,2042.36 2875.55,2022.28 2875.55,2002.91 U11.7
VCHARGE: C16.1 R16.1 R17.1 U12.3 | length 492.5
  Top Layer w30: R16.1 2680.75,2310.1 2681.22,2309.62 2681.22,2303.78 2760,2225 2825,2225 2885,2285 ; C16.1 2875,2295 ; U12.3 2868.31,2301.69 2875,2295 ; R17.1 2885,2285 ; 2875,2295 2885,2285
VCHARGE_IN: P2.7 U12.1 U12.4 | length 1911.9
  Top Layer w50: P2.7 2010,1730 2065,1785 2065,2190 2385,2510 2685,2510 2789.41,2405.59 U12.4
VINT: C6.2 C8.2 C11.1 U4.11 U6.5 U7.5 U8.7 U8.8 | length 1237.4
  Top Layer w10: v1(2215,1445) 2215,1386.14 2334.41,1266.73 U4.11 ; v1(2253.25,1500.13) 2253.25,1502.3 2258.78,1507.83 2258.78,1548.41 U6.5 2303.44,1549.62 C6.2 2324.41,1510.59 v1(2340,1495) ; U7.5 2485.16,1550.59 C8.2 2509.41,1514.37 2613.31,1410.47 2675.31,1410.47 2688.94,1424.09 ; U8.7 U8.8 2688.94,1448.94 2688.94,1424.09 ; C11.1 2688.31,1387.05 2688.31,1398.62 2688.94,1399.25 2688.94,1424.09
  Bottom Layer w10: v1(2215,1445) 2253.25,1483.25 v1(2253.25,1500.13) ; v1(2340,1495) v1(2530,1495)
VREF: R9.1 R10.1 U6.3 U7.3 | length 730.8
  Top Layer w10: U6.3 2208.82,1686.65 2215,1692.84 v1(2215,1695) ; U7.3 2389.41,1693.96 v1(2390.03,1694.58) ; R9.1 R10.1 2693.94,1686.77 2700,1692.84 v1(2700,1695)
  Bottom Layer w10: v1(2215,1695) v1(2700,1695)
VSUP: D3.2 P2.8 | length 1204.3
  Top Layer w10: v1(2515,1400) 2534.41,1380.59 D3.2
  Bottom Layer w10: P2.8 1620,1630 1850,1400 v1(2515,1400)
pads on no net: U4.6 U4.8 U4.9 U5.3 U8.3 U8.4 U8.5 U9.2 U9.10 U9.11 U9.12 U9.13 U10.3 U10.5 U10.6 U11.3 U11.5 U11.6 U13.10 U13.11 U13.12

## Polygon pours and split planes (outlines as drawn)
GND on Bottom Layer "NONET_L02_P000" (solid, shelved, pour order 0): 1422.49,2612.55 1428.07,765 3875,765 3875,2612.55